# Altium PCB pcb_2Layer.PcbDoc
Units mm, origin at the board's own origin, x right, y up, seen from the top; angles counter-clockwise.
Board outline 100 x 50 mm, 2 copper layers (Top Layer, Bottom Layer), stack 1.576 mm thick; 50 components, 25 nets, 135 pads, 0 vias.
Unrouted connection lines stored in the file: 100.
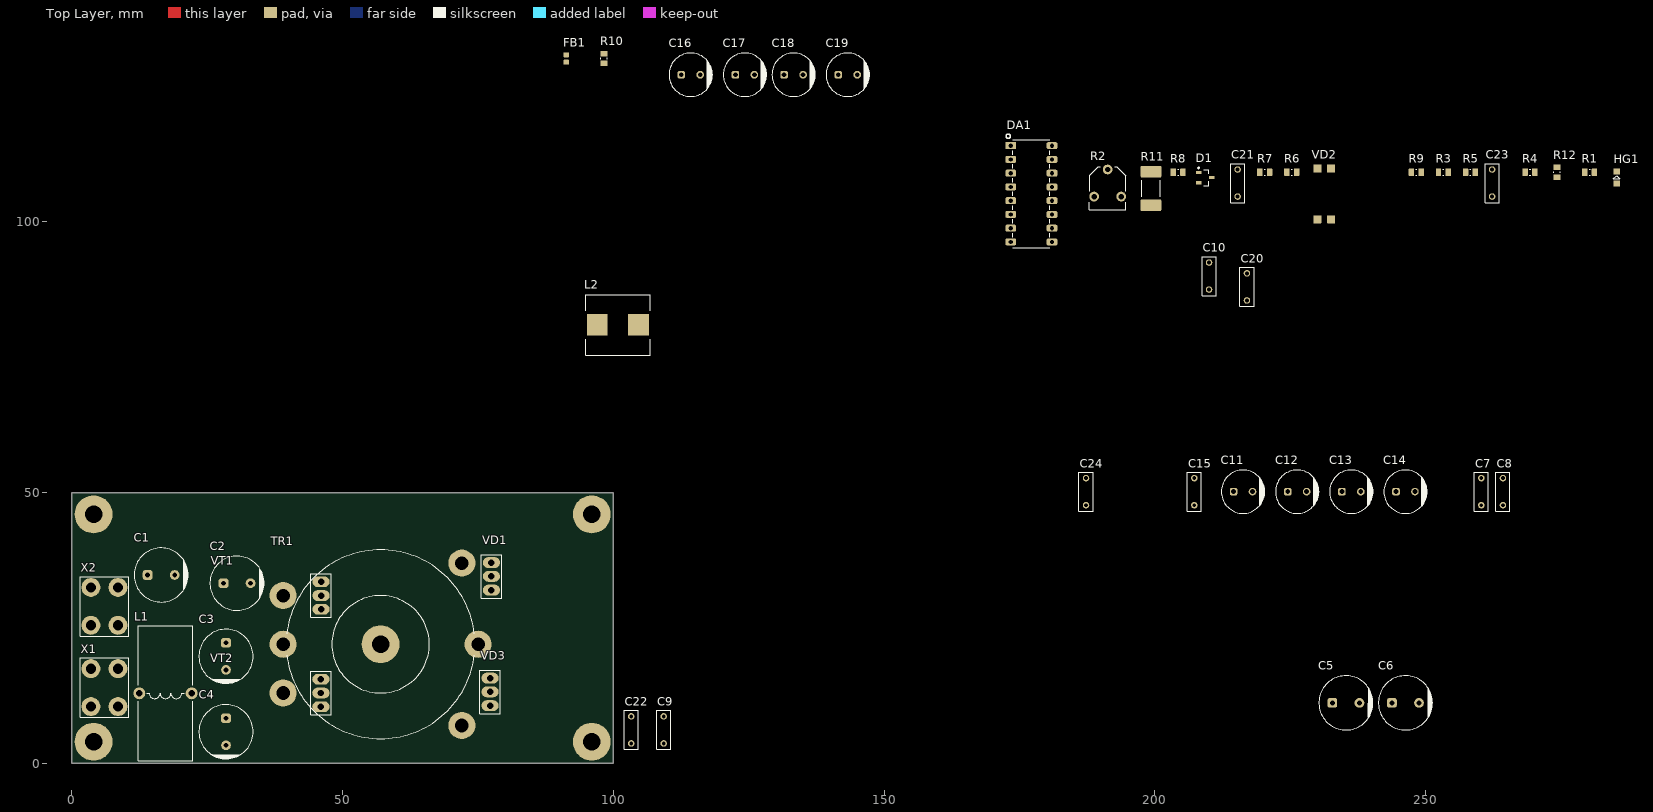
[diagram p0: Top Layer view]
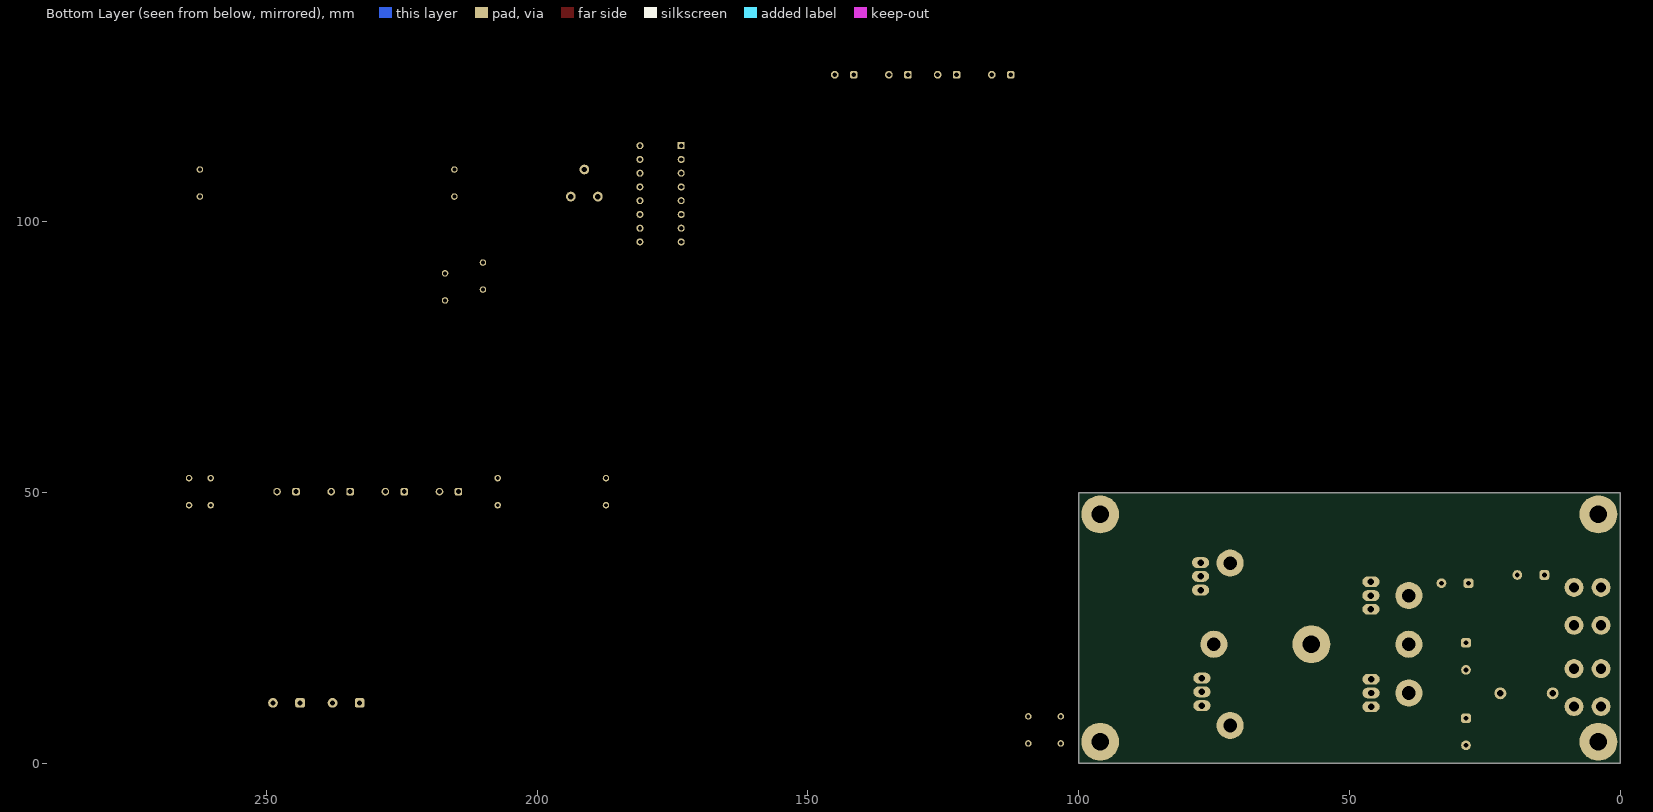
[diagram p1: Bottom Layer view, seen from below]

## Layer stack, top to bottom
Top Solder: solder mask 0.012, Solder Resist, Dk 3.5
Top Layer: signal copper 0.038
Dielectric 1: dielectric 1.5, FR-4, Dk 4.8
Bottom Layer: signal copper 0.038
Bottom Solder: solder mask 0.012, Solder Resist, Dk 3.5

## Board outline
0,0 100,0 100,50 0,50

## Design rules (kind name [scope] priority, off if disabled: settings)
BoardOutlineClearance [All] p1: gap=0.5 ignorepadtopadclearanceinfootprint=FALSE
Clearance MiddleVoltage [InNetClass('MiddleVoltage')] p1: gap=0.5 ignorepadtopadclearanceinfootprint=FALSE except(0: Arc-Hole Track-Hole SMDPad-Hole THPad-Hole Via-Hole Fill-Hole Poly-Hole Region-Hole Text-Hole; 0.2: Arc-Text Track-Text SMDPad-Text THPad-Text Via-Text Fill-Text Poly-Text Region-Text Text-Text)
Clearance HighVoltage [InNetClass('HighVoltage')] p2: gap=1 ignorepadtopadclearanceinfootprint=FALSE except(0: Arc-Hole Track-Hole SMDPad-Hole THPad-Hole Via-Hole Fill-Hole Poly-Hole Region-Hole Text-Hole; 0.2: Arc-Text Track-Text SMDPad-Text THPad-Text Via-Text Fill-Text Poly-Text Region-Text Text-Text)
Clearance Standart [All] p3: gap=0.2 ignorepadtopadclearanceinfootprint=FALSE except(0: Arc-Hole Track-Hole SMDPad-Hole THPad-Hole Via-Hole Fill-Hole Poly-Hole Region-Hole Text-Hole)
ComponentClearance [All] p1: gap=0.1 collisioncheckmode=3 verticalgap=0.1 showdistances=TRUE
Height [All] p1: minheight=0 maxheight=40 prefheight=12.7
HoleSize [All] p1: absolutevalues=TRUE maxlimit=12 minlimit=0.3 maxpercent=80.000 minpercent=20.000
HoleToHoleClearance [All] p1: gap=0.3 allowstackedmicrovias=TRUE
MinimumSolderMaskSliver [All] p1: minsoldermaskwidth=0.1
NetAntennae [All] p1: netantennaetolerance=2
PlaneClearance [All] p1: clearance=0.3
PlaneConnect PlaneConnectMiddleCurrent [InNetClass('MiddleCurrent')] p1: planeconnectstyle=Relief reliefexpansion=0.508 reliefentries=4 reliefconductorwidth=0.5 reliefairgap=0.3
PlaneConnect PlaneHighCurrent [InNetClass('HighCurrent')] p2: planeconnectstyle=Relief reliefexpansion=0.508 reliefentries=4 reliefconductorwidth=0.5 reliefairgap=0.35
PlaneConnect [All] p3: planeconnectstyle=Relief reliefexpansion=0.508 reliefentries=4 reliefconductorwidth=0.3 reliefairgap=0.3
PolygonConnect PolygonConnectMiddleCurrent [All vs InNetClass('MiddleCurrent')] p1: connectstyle=Relief reliefconductorwidth=0.4 reliefentries=4 polygonreliefangle="90 Angle" airgapwidth=0.3
PolygonConnect PolygonHighCurrent [InNetClass('HighCurrent')] p2: connectstyle=Relief reliefconductorwidth=0.5 reliefentries=4 polygonreliefangle="90 Angle" airgapwidth=0.3
PolygonConnect PolygonConnect_Keepout [(ObjectKind = 'Track') And (Layer = 'KeepOutLayer')] p3: connectstyle=Direct reliefconductorwidth=0.254 reliefentries=4 polygonreliefangle="90 Angle" airgapwidth=0.254
PolygonConnect PolygonConnect_Via [IsVia] p4: connectstyle=Direct reliefconductorwidth=0.254 reliefentries=4 polygonreliefangle="90 Angle" airgapwidth=0.254
PolygonConnect [All] p5: thpad.connectstyle=Relief thpad.reliefconductorwidth=0.3 thpad.reliefentries=4 thpad.polygonreliefangle="90 Angle" thpad.airgapwidth=0.25 smdpad.connectstyle=Relief smdpad.reliefconductorwidth=0.3 smdpad.reliefentries=4 smdpad.polygonreliefangle="90 Angle" smdpad.airgapwidth=0.25 via.connectstyle=Direct via.reliefconductorwidth=0.3 via.reliefentries=4 via.polygonreliefangle="90 Angle" via.airgapwidth=0.3
RoutingCorners [All] p1: cornerstyle=45-Degree minsetback=1 maxsetback=3
RoutingVias Power [InNetClass('Power')] p1: holewidth=0.8 width=1.5 viastyle="Through Hole" minholewidth=0.5 minwidth=1 maxholewidth=1.2 maxwidth=3
RoutingVias [All] p2: holewidth=0.4 width=0.8 viastyle="Through Hole" minholewidth=0.3 minwidth=0.6 maxholewidth=0.5 maxwidth=1
SilkToSilkClearance [All] p1: silktosilkclearance=0
SilkToSolderMaskClearance [IsPad] p1: minsilkscreentomaskgap=0.05 clearancetoexposedcopper=TRUE
SolderMaskExpansion SolderMaskExpansion_VIA [IsVia] p1: expansion=-3 istentingtop=TRUE useseparateexpansions=TRUE expansionbottom=-3 istentingbottom=TRUE
SolderMaskExpansion [All] p2: expansion=0.05 istentingtop=FALSE
SupplyNets "Schematic Supply Nets_7" [InNet('GND16')] p1: voltage=0.000
SupplyNets "Schematic Supply Nets_6" [InNet('+VBAT')] p2: voltage=0.000
SupplyNets "Schematic Supply Nets_5" [InNet('5VREF')] p3: voltage=0.000
SupplyNets "Schematic Supply Nets_4" [InNet('RSH')] p4: voltage=0.000
SupplyNets "Schematic Supply Nets_2" [InNet('GND')] p5: voltage=0.000
Width Width_ANT [InNetClass('Anthenna')] p1: maxlimit=1.641 minlimit=0.2 preferedwidth=1.641
Width WidthMiddleCurrent [InNetClass('MiddleCurrent')] p2: maxlimit=2 minlimit=0.35 preferedwidth=0.5
Width WidthHighCurrent [InNetClass('HighCurrent')] p3: maxlimit=5 minlimit=0.5 preferedwidth=1
Width [All] p4: maxlimit=0.5 minlimit=0.2 preferedwidth=0.25
19 further rules are at their usual default settings.

## Components (designator, comment, footprint, x,y, rotation, side; value= is the part's Value field where it differs from the comment)
C1 "1000uFx25V" CAP-AE-PTH-100D05x200H20 16.47,34.798 r0 top value=1000uF
C2 "1000uFx25V" CAP-AE-PTH-100D05x200H20 30.48,33.274 r0 top value=1000uF
C3 "1000uFx25V" CAP-AE-PTH-100D05x200H20 28.448,19.772 r270 top value=1000uF
C4 "1000uFx25V" CAP-AE-PTH-100D05x200H20 28.448,5.842 r270 top value=1000uF
C5 "1000uFx25V" CAP-AE-PTH-100D05x200H20 235.273,11.181 r0 top value=1000uF
C6 "1000uFx25V" CAP-AE-PTH-100D05x200H20 246.273,11.181 r0 top value=1000uF
C7 "Film capacitor, 100nF, 450VDC, ±10%, 10.9mOhm, 31.5x15 mm, -40...+105°C" "CAP: MKS2 (W=2.50MM)" 260.273,50.181 r90 top value=100nF
C8 "Film capacitor, 100nF, 450VDC, ±10%, 10.9mOhm, 31.5x15 mm, -40...+105°C" "CAP: MKS2 (W=2.50MM)" 264.273,50.181 r90 top value=100nF
C9 "Film capacitor, 10uF, 450VDC, ±10%, 10.9mOhm, 31.5x15 mm, -40...+105°C" "CAP: MKS2 (W=2.50MM)" 109.273,6.181 r90 top value=10uF
C10 "Film capacitor, 100nF, 450VDC, ±10%, 10.9mOhm, 31.5x15 mm, -40...+105°C" "CAP: MKS2 (W=2.50MM)" 210,90 r90 top value=100nF
C11 "470uFx25V" CAP-AE-PTH-80D05x130H15 216.273,50.181 r0 top value=470uF
C12 "470uFx25V" CAP-AE-PTH-80D05x130H15 226.273,50.181 r0 top value=470uF
C13 "470uFx25V" CAP-AE-PTH-80D05x130H15 236.273,50.181 r0 top value=470uF
C14 "470uFx25V" CAP-AE-PTH-80D05x130H15 246.273,50.181 r0 top value=470uF
C15 "Film capacitor, 100nF, 450VDC, ±10%, 10.9mOhm, 31.5x15 mm, -40...+105°C" "CAP: MKS2 (W=2.50MM)" 207.273,50.181 r90 top value=100nF
C16 "470uFx25V" CAP-AE-PTH-80D05x130H15 114.273,127.181 r0 top value=470uF
C17 "470uFx25V" CAP-AE-PTH-80D05x130H15 124.273,127.181 r0 top value=470uF
C18 "470uFx25V" CAP-AE-PTH-80D05x130H15 133.273,127.181 r0 top value=470uF
C19 "470uFx25V" CAP-AE-PTH-80D05x130H15 143.273,127.181 r0 top value=470uF
C20 "Film capacitor, 100nF, 450VDC, ±10%, 10.9mOhm, 31.5x15 mm, -40...+105°C" "CAP: MKS2 (W=2.50MM)" 217,88 r90 top value=100nF
C21 "Film capacitor, 100nF, 450VDC, ±10%, 10.9mOhm, 31.5x15 mm, -40...+105°C" "CAP: MKS2 (W=2.50MM)" 215.273,107.181 r90 top value=100nF
C22 "Film capacitor, 1n, 450VDC, ±10%, 10.9mOhm, 31.5x15 mm, -40...+105°C" "CAP: MKS2 (W=2.50MM)" 103.273,6.181 r90 top value=1n
C23 "Film capacitor, 1n, 450VDC, ±10%, 10.9mOhm, 31.5x15 mm, -40...+105°C" "CAP: MKS2 (W=2.50MM)" 262.273,107.181 r90 top value=1n
C24 "Film capacitor, 100nF, 450VDC, ±10%, 10.9mOhm, 31.5x15 mm, -40...+105°C" "CAP: MKS2 (W=2.50MM)" 187.273,50.181 r90 top value=100nF
D1 "TL431ACDBZR" SOT-23_MED 209.273,108.181 r0 top
DA1 "UC3525" DIP16 173.38,114.08 r0 top
FB1 "BLM18KG331SH1D" BLM18-Series_H80T15 91.273,130.181 r90 top value="330 Ohms @ 100MHz"
HG1 "LTST-C171GKT" LTST-C171GKT 285.273,108.181 r90 top
L1 "Fixed inductor, 10μH, ±20%, R22.9/14/7.62, Kool Mu, µ=125, 90 нГн/витков2" "IND: R22.9/14/7.62 (H)" 17.272,12.954 r180 top value=10μH
L2 "2.4uH" 744325240 100.82,81 r180 top
R1 "22" R_ANY_CHIP_0805_MED 280.273,109.181 r0 top
R2 "20k" 3306F-1-xxx 191.273,107.181 r0 top
R3 "22" R_ANY_CHIP_0805_MED 253.273,109.181 r0 top
R4 "120" R_ANY_CHIP_0805_MED 269.273,109.181 r0 top
R5 "1k" R_ANY_CHIP_0805_MED 258.273,109.181 r0 top
R6 "1k" R_ANY_CHIP_0805_MED 225.273,109.181 r0 top
R7 "22" R_ANY_CHIP_0805_MED 220.273,109.181 r0 top value=10k
R8 "2k7" R_ANY_CHIP_0805_MED 204.273,109.181 r0 top
R9 "1k" R_ANY_CHIP_0805_MED 248.273,109.181 r0 top
R10 "1k" R_ANY_CHIP_0805_MED 98.273,130.181 r90 top
R11 "40mOhm" HoLLR2512-Series 199.273,106.181 r90 top value=0.04
R12 "15k" R_ANY_CHIP_0805_MED 274.273,109.181 r90 top
TR1 "TR" "TR: R32.8/20.1/10.7 (L) - MidPoint - 2" 57,22 r0 top
VD1 "DIODE SCHOTTKY" TO220(H) 77.47,34.544 r270 top
VD2 "LTV-817S-TA1" LTV-817S-TA1_REC 231.273,105.181 r0 top
VD3 "DIODE SCHOTTKY" TO220(H) 77.216,13.208 r270 top
VT1 "AOD403" TO220(H) 46,31 r90 top
VT2 "AOD403" TO220(H) 45.974,13 r90 top
X1 "Power connector, *, *" "CON: 8191" 6,14 r0 top
X2 "Power connector, *, *" "CON: 8191" 6,29 r0 top

## Footprints (in the part's own frame and the unit in brackets; to place one, negate y for a bottom-side part, rotate by r counter-clockwise, add the part's x,y. Pads: shape width x height; smd on the part's side, far side on the other; paste and mask are expansions set on the pad)
3306F-1-xxx [mm] "Trimmer Potentiometer"
  round 1.8 hole 1 mask+0.05: 1(-2.5,-2.5) 2(0,2.5) 3(2.5,-2.5)
  silkscreen extent -3.36,-4.95 3.35,3, body extent -3.4,-5.05 3.41,3.07, height 8.34
744325240 [mm]
  rrect5% 3.85x4 smd: 1(-3.82,0) 2(3.82,0)
  silkscreen extent -5.98,-5.53 5.98,5.59, body extent -5.82,-5.35 5.82,5.35, height 5
BLM18-Series_H80T15 [mm] "Chip Inductor, 2-Leads, Body 1,60x0,80mm, IPC Medium Density"
  rrect15% 0.87x0.98 smd mask+0.05: 1(-0.665,0) 2(0.665,0)
  body extent -0.87,-0.47 0.88,0.48, height 0.95
CAP-AE-PTH-80D05x130H15 [mm] "PTH Aluminium Electrolytic Capacitor, Diameter 8mm, Height 13mm"
  rrect50% 1.4x1.4 hole 0.9: 1(-1.75,0)
  round 1.4 hole 0.9: 2(1.75,0)
  silkscreen extent -4,-4 4.03,4, body extent -4.25,-4.25 4.25,4.25, height 14.5
CAP-AE-PTH-100D05x200H20 [mm] "PTH Aluminium Electrolytic Capacitor, Diameter 10mm, Height 20mm"
  rrect50% 1.8x1.8 hole 0.9: 1(-2.5,0)
  round 1.8 hole 0.9: 2(2.5,0)
  silkscreen extent -5,-5 5,5, body extent -5.25,-5.25 5.25,5.25, height 22
"CAP: MKS2 (W=2.50MM)" [mm]
  round 1.2 hole 0.7: 1(-2.5,0) 2(2.5,0)
  silkscreen extent -3.6,-1.3 3.6,1.3, body extent -3.6,-1.25 3.6,1.25, height 6.5
"CON: 8191" [mm]
  round 3.5 hole 1.9: 1(-2.5,-3.5) 1(-2.5,3.5) 1(2.5,-3.5) 1(2.5,3.5)
  silkscreen extent -4.5,-5.5 4.5,5.5, body extent -4,-4 4,4, height 7.05
DIP16 [mm]
  rect 2x1.295 / inner round 1.524 / far side rect 1.295x1.295 hole 0.787 paste-2539.97 mask+0: 1(0,0)
  rrect50% 2x1.295 / inner round 1.524 / far side round 1.295 hole 0.8 paste-2539.97 mask+0: 2(0,-2.54) 3(0,-5.08) 4(0,-7.62) 5(0,-10.16) 6(0,-12.7) 7(0,-15.24) 8(0,-17.78) 9(7.62,-17.78) 10(7.62,-15.24) 11(7.62,-12.7) 12(7.62,-10.16) 13(7.62,-7.62) 14(7.62,-5.08) 15(7.62,-2.54) 16(7.62,0)
  silkscreen extent -0.88,-18.86 7.24,2.15, body extent -0.13,-18.73 8,0.95, height 5.21
HoLLR2512-Series [mm]
  rrect15% 2.1x3.8 smd mask+0.05: 1(-3.1,0) 2(3.1,0)
  silkscreen extent -1.5,-1.7 1.5,1.7, body extent -3.3,-1.71 3.3,1.72, height 0.89
"IND: R22.9/14/7.62 (H)" [mm]
  round 2.2 hole 1.2: 1(-4.83,0.015) 2(4.83,0.015)
  silkscreen extent -5,-12.5 5,12.5, body extent -4.83,-12.47 4.83,12.47, height 24.77
LTST-C171GKT [mm]
  rrect15% 1.1x1.25 smd mask+0.05: AN(-1.1,0) CA(1.1,0)
  silkscreen extent -0.25,-0.6 0.35,0.6, body extent -1.05,-0.67 1.05,0.68, height 0.9
LTV-817S-TA1_REC [mm] "SMD Optocoupler 5kV"
  rrect15% 1.5x1.5 smd: 1(-1.27,-4.7) 2(1.27,-4.7) 3(1.27,4.7) 4(-1.27,4.7)
  body extent -2.31,-5.09 2.29,5.07, height 3.76
R_ANY_CHIP_0805_MED [mm] "Chip Resistor, 2-Leads, Body 2,00x1,25mm, IPC Medium Density"
  rrect15% 1x1.35 smd: 1(-0.9,0) 2(0.9,0)
  silkscreen extent -0.1,-0.58 0.1,0.58, body extent -1,-0.67 1,0.68, height 0.6
SOT-23_MED [mm] "SOT23, 3-Leads, Body 2,92x2,37mm, Pitch 0,95mm, IPC Medium Density"
  rrect15% 1x0.6 smd: 1(-1.2,0.95) 2(-1.2,-0.95) 3(1.2,0)
  silkscreen extent -1.32,-1.5 0.7,1.92, body extent -1.32,-1.52 1.32,1.52, height 1.12
TO220(H) [mm]
  oval 2x3.2 hole 1.2: 1(-2.54,0) 2(0,0) 3(2.54,0)
  silkscreen extent -4,-1.9 4,1.9, body extent -4.95,-0.37 4.95,20.67, height 2.76
"TR: R32.8/20.1/10.7 (L) - MidPoint - 2" [mm]
  round 5 hole 2.5: 1(-18,9) 2(-18,-9) 3(-18,0) 4(15,15) 5(15,-15) 6(18,0)
  round 7 hole 3.2: ""(0,0)
  silkscreen extent -17.31,-17.43 17.31,17.43, body extent -17.43,-17.4 17.43,17.4, height 12.84

## Part data
C1 C2 C3 C4 C5 C6: library part ESH108M025AH4AA, "1000uF 25V ±20% Aluminum Electrolytic Capacitors Radial, 2000 Hrs @ 105°C, 740mA Ripple Current", Dielectric Type=NONE, Manufacturer=Kemet, Package=D10x20mm, Supplier Part Number 1=80-ESH108M025AH4AA, Temperature Range="-40°C ~ 105°C", Tolerance=±20%, Voltage=25V, Ajax_1C_PN=NONE, Ajax_1С_Status="RND Only", Component Status=Released, Component Type=PTH, ComponentLink1Description=Datasheet, ComponentLink1URL=https://eu.mouser.com/datasheet/2/212/KEM_A4005_ESH-1101279.pdf, Part Number=ESH108M025AH4AA, Part Type=Aluminum, Price=NONE, Replacement=NONE, Standard Lead Time="30 Weeks", Supplier 1=Mouser
C7 C8 C9 C10 C15 C20 C21 C22 C23 C24: library part Film, Manufacturer=Epcos, Package="31.5x15 mm", PartNumber=B32774D4106K000, Temperature=-40...+105°C, Tolerance=±10%, TypeCapacitor="Film capacitor", Voltage=450VDC, HelpURL=https://www.digikey.com/products/en/capacitors/film-capacitors/62?k=&pkeyword=&sv=0&pv2097=1958&sf=0&FV=fffc01ef%2C1f140000%2Cffe0003e%2Cffec6366&quantity=1&ColumnSort=1000011&page=1&stock=1&pageSize=25, Impedance=10.9mOhm
  C7 C8 C10 C15 C20 C21 C24: ValueManufacturerPartNumber="Film capacitor, 100nF, 450VDC, ±10%, 10.9mOhm, 31.5x15 mm, -40...+105°C"
  C9: ValueManufacturerPartNumber="Film capacitor, 10uF, 450VDC, ±10%, 10.9mOhm, 31.5x15 mm, -40...+105°C"
  C22 C23: ValueManufacturerPartNumber="Film capacitor, 1n, 450VDC, ±10%, 10.9mOhm, 31.5x15 mm, -40...+105°C"
C11 C12 C13 C14 C16 C17 C18 C19: library part KS-025V471MF130, "470uF 25V ±20% D8x13mm Conductive Polymer Aluminum Solid Capacitor, 2000 Hrs @ 105°C, 4100mA Ripple Current", Dielectric Type=NONE, Manufacturer=Koshin, Package=D8x13mm, Temperature Range="-55°C ~ 105°C", Tolerance=±20%, Voltage=25V, Ajax_1C_ID=45913, Ajax_1C_PN="470uF 25V 20% Low ESR 8x13mm (KS-025V471MF130 - Koshin) Aluminium Capacitors", Ajax_1С_Status="Mass Production", Component Status=Released, Component Type=PTH, ComponentLink1Description=Datasheet, ComponentLink1URL=\\altiumdb.ajax.local\files\Datasheet\Capacitor\KS-Series.pdf, GUID_1C=2652f362-010b-11ed-a361-005056994834, Part Number=KS-025V471MF130, Part Type=Aluminum, Price=0.07, Replacement=NONE
D1: "Adjustable Precision Shunt Regulator, Accuracy 1%,  SOT-23-3", Manufacturer="Texas Instruments", Package=SOT-23, Supplier Part Number 1=296-17328-1-ND, Temperature Range="0°C ~ 70°C", Ajax_1C_ID=6287, Ajax_1C_PN="TL431ACDBZR (SOT-23)", Ajax_1С_Status="Mass Production", Component Status=Released, Component Type=SMD, ComponentLink1Description=Datasheet, ComponentLink1URL=https://www.ti.com/lit/ds/symlink/tl431.pdf, GUID_1C=b426e85d-df70-11e4-9f89-a45d36c4a9e5, Part Number=TL431ACDBZR, Part Type="Voltage Reference", Price=0.046, Replacement=NONE, Standard Lead Time="8 Weeks", Supplier 1=Digi-Key
DA1: "Buck, Push-Pull Regulator Positive Output Step-Down, Step-Up/Step-Down DC-DC Controller IC 16-DIP/16-SOIC", Manufacturer=Texas, Package=DIP16, Part Number=UC3825, Supplier Part Number 1=1727-6049-2-ND, Temperature Range="-40°C ~ 125°C", Component Status=Released, Component Type=SMD, ComponentLink1Description=Datasheet, ComponentLink1URL=https://assets.nexperia.com/documents/data-sheet/74HC_HCT4051.pdf, GUID_1C=956a5446-e932-11eb-ab74-0050569f2651, Part Type="IC REG CTRLR BCK/PUSH-PULL", Price=0.11383574, Replacement=NONE, Standard Lead Time="8 Weeks", Supplier 1=Digi-Key
FB1: "330 Ohms @ 100 MHz Power Line Ferrite Bead 0603, 1.7A 80mOhm", Current=1.7A, Manufacturer="Murata Electronics", Package=0603, Saturation Current=NONE, Supplier Part Number 1=490-13257-2-ND, Temperature Range="-55°C ~ 125°C", Tolerance=±25%, Ajax_1C_ID=31487, Ajax_1C_PN="330R 1.7A BLM18KG331SH1D 0603 Murata Ferrite Bead", Ajax_1С_Status="RND Only", Component Status=Released, Component Type=SMD, ComponentLink1Description=Datasheet, ComponentLink1URL=https://www.murata.com/en-us/products/productdata/8796737273886/QNFA9101.pdf, GUID_1C=8fa34a67-d98f-11eb-ab74-0050569f2651, Part Number=BLM18KG331SH1D, Part Type="Ferrite Bead", Price=0.0072, Replacement=NONE, Standard Lead Time="15 Weeks", Supplier 1=Digi-Key
HG1: "Low Power LED, Green 565nm, Clear, SMD 0805, Vf 2.1V - 2.6V, 5 ~ 12mcd @ 20 mA, 130°", Color=Green, Manufacturer="Lite-On Optoelectronics", Package=0805, Supplier Part Number 1=160-1423-2-ND, Temperature Range="-55°C ~ 85°C", Ajax_1C_ID=30364, Ajax_1C_PN="LTST-C171GKT Green SMD LED 0805 12mcd 20mA 130deg RoHS", Ajax_1С_Status="RND Only", Component Status=Released, Component Type=SMD, ComponentLink1Description=Datasheet, ComponentLink1URL=https://media.digikey.com/pdf/Data%20Sheets/Lite-On%20PDFs/LTST-C171GKT.pdf, GUID_1C=df39881f-c399-11eb-ab74-0050569f2651, Part Number=LTST-C171GKT, Part Type="LED / 0805", Price=0.06, Replacement=NONE, Supplier 1=Digi-Key, Wavelength=565nm
L1: library part Inductor_R22.9/14/7.62, Manufacturer=Magnetics, Package=R22.9/14/7.62, PartNumber=0077310A7, Tolerance=±20%, TypeInductor="Fixed inductor", ValueManufacturerPartNumber="Fixed inductor, 10μH, ±20%, R22.9/14/7.62, Kool Mu, µ=125, 90 нГн/витков2", AL="90 нГн/витков2", HelpURL=http://ferrite.ru/warehouse/r-22-9147-62-77310-a7.html, MaterialPermeability=µ=125, TypeMatiriel="Kool Mu"
L2: library part 744325240, "2.4uH Shielded Wirewound Inductor 14A 4.75mOhm Max, 10.5x10.2mm, Height 5mm Max", Current=14A, Manufacturer="Wurth Elektronik", Package=10.5x10.2x5mm, Saturation Current=17A, Supplier Part Number 1=732-1168-2-ND, Temperature Range="-40°C ~ 150°C", Tolerance=±20%, Ajax_1C_ID=66330, Ajax_1C_PN="2.4uH 14A 20% 744325240 Wurth SMD Inductor", Ajax_1С_Status="RND Only", Component Status=Released, Component Type=SMD, ComponentLink1Description=Datasheet, ComponentLink1URL=https://eu.mouser.com/datasheet/2/445/744325240-3093497.pdf, GUID_1C=708811f9-d448-11ed-a36c-005056994834, Part Number=744325240, Part Type="Power / Iron Powder Core", Price=4.27, Replacement=NONE, Standard Lead Time="26 Weeks", Supplier 1=Digi-Key
R1 R3 R4 R5 R6 R7 R8 R9 R10 R12: library part RC0805JR-0722RL, "22 Ohms ±5%, 1/8W 0805 Thick Film Resistor", Manufacturer=Yageo, Package=0805, Power Rating=0.125W, Temperature Range="-55°C ~ 155°C", Temperature Stability=±100ppm/°C, Tolerance=±5%, Voltage=150V, Ajax_1C_ID=8822, Ajax_1C_PN="22R 5% 0805 Resistors SMD RoHS", Ajax_1С_Status="Mass Production", Component Status=Released, Component Type=SMD, ComponentLink1Description=Datasheet, ComponentLink1URL=https://eu.mouser.com/datasheet/2/447/PYu_RC_Group_51_RoHS_L_10-1664068.pdf, GUID_1C=3ba40fec-5951-11e6-81ec-d8cb8a9acc66, Part Number=RC0805JR-0722RL, Part Type="Thick Film", Price=0.0011, Replacement=NONE
R2: library part 3306F-1-203, "20 kOhms ±25%, 0.2W, PTH Trimmer Potentiometer, Cermet, Turn Top Adjustment", Manufacturer=Bourns, Package=8.1x6.8mm, Power Rating=0.2W, Temperature Range="-25°C ~ 100°C", Temperature Stability=±250ppm/°C, Tolerance=±25%, Ajax_1C_PN=NONE, Ajax_1С_Status="RND Only", Component Status="On Review", Component Type=PTH, ComponentLink1Description=Datasheet, ComponentLink1URL=https://www.bourns.com/docs/Product-Datasheets/3306.pdf, Part Number=3306F-1-203, Part Type="Trimming Potentiometer", Price=NONE, Replacement=NONE, Supplier 1=Digi-Key, Supplier Part Number 1=3306F-1-203
R11: library part HoLLR2512-2W-40mR-1%, "40mOhm ±1%, 2W Surface Mount 77.5A ±50ppm 2512 Encapsulated Metal Alloy Current Sense Resistors", Manufacturer=Milliohm, Package=2512, Power Rating=2W, Supplier Part Number 1=C2994633, Temperature Range="-55°C ~ 170°C", Temperature Stability=±50ppm/°C, Tolerance=±1%, Voltage=NONE, Ajax_1C_PN=NONE, Ajax_1С_Status="RND Only", Component Status=Released, Component Type=SMD, ComponentLink1Description=Datasheet, ComponentLink1URL=https://datasheet.lcsc.com/lcsc/2204121445_Milliohm-HoLLR2512-2W-40mR-1-_C2994633.pdf, Part Number=HoLLR2512-2W-40mR-1%, Part Type="Metal Alloy", Price=NONE, Replacement=NONE, Supplier 1=LCSC
TR1: library part "Toroidal Transformator Midpoint_1", Manufacturer=Handmade, Part Number=RLB0914-3R3ML-ND, Saturation Current=11.3A, Tolerance=±20%, ComponentLink1Description=Datasheet, ComponentLink1URL=https://www.vishay.com/docs/34193/ihlp-4040dz-01.pdf
VD1 VD3: "Diode Schottky Array 1 Pair Common Cathode, 120V 20A, TO-220", Current=20A, Manufacturer=STMicroelectronics, Package=TO-220AB, Part Number=STPS20SM120ST, Supplier Part Number 1=497-15563-5-ND, Temperature Range="-65°C ~ 150°C", Voltage=120V, Component Status=Released, Component Type=PTH, ComponentLink1Description=Datasheet, ComponentLink1URL=https://www.st.com/resource/en/datasheet/stps20sm120s.pdf, Marking=STPS20SM120, Part Type=Schottky, Price=NONE, Replacement=NONE, Standard Lead Time="11 Weeks", Supplier 1=Digi-Key, Vf="0.75V @ 10A"
VD2: "1-Channel Photocoupler, 5kV, SSOP-4", Color=NONE, Manufacturer="Lite-On Optoelectronics", Package=SSOP-4, Supplier Part Number 1=160-1893-2-ND, Temperature Range="-55°C ~ 110°C", Ajax_1C_ID=12260, Ajax_1C_PN="LTV-817S-TA1 оптопара", Ajax_1С_Status="Mass Production", Component Status=Released, Component Type=SMD, ComponentLink1Description=Datasheet, ComponentLink1URL=https://optoelectronics.liteon.com/upload/download/DS-70-96-0016/LTV-8X7%20series%20201610%20.pdf, GUID_1C=36a51d61-3103-11e8-822a-14dda9d2d04d, Part Number=LTV-817S-TA1, Part Type=Optocoupler, Price=0.053, Replacement=LTV-816S-TA1, Supplier 1=Digi-Key, Wavelength=NONE
VT1 VT2: library part N-CH_MOSFET, "P-MOSFET; полевой; -30В; -55А; 45Вт; TO252", Package=D-PAK, Component Type=SMD, ComponentLink1Description=Datasheet, ComponentLink1URL=https://www.tme.eu/Document/dd9e9fcbccf7c5b1f5f9da06cbc5bf44/AOD403-DTE.pdf, ComponentLink2Description=imrad, ComponentLink2URL=https://imrad.com.ua/ua/aod403-7?srsltid=AfmBOoqbv76D2b_UWMskTCTCmXEIhcjdT6a5VOgt9k0M-VKdEIqWTw9d, Id=-55А, Part Number=AOD403, Part Type=P-Channel, RDS=8mR, Vds=-30V
X1 X2: library part Connector_single_power, TypeConnector="Power connector", ValueManufacturerPartNumber="Power connector, *, *"
  X1: CommentText=+
  X2: CommentText=-

## Free pads (board coordinates)
  round 7 hole 3.2: 1(4,4) 1(4,46) 1(96,4) 1(96,46)

## Nets (pads, with @x,y where several pads share a name; then routed paths per layer and width w, separated by ;. In a path a pad name is that pad's centre, name@x,y a point inside that pad or via, vN(x,y) a via of type N, cw(c..) or ccw(c..) an arc to the next point about the centre after c; other vN are vias at no path point)
5VREF: C24.1 DA1.1 FB1.2 R9.2
+VBAT: C1.1 C2.1 C3.1 C4.1 C5.1 C6.1 C7.1 C8.1 C9.1 C10.1 C11.1 C12.1 C13.1 C14.1 C16.1 C17.1 C18.1 C19.1 C20.1 DA1.13 DA1.15 L1.1 L2.2 R5.2 R7.2 R10.2 TR1.3
COMP: DA1.9 R9.1 VD2.4
G1: R1.2 VT1.1
G2: R3.2 VT2.1
GND: C1.2 C2.2 C3.2 C4.2 C5.2 C6.2 C7.2 C9.2 C10.2 C22.1 C23.2 C24.2 DA1.2 DA1.12 R2.1 R11.2 R12.1 VD2.3 X2.1
GND16: C11.2 C12.2 C13.2 C14.2 C15.1 C16.2 C17.2 C18.2 C19.2 C20.2 D1.3 HG1.CA R8.1 TR1.6
NetC21_1: C21.1 D1.1 R6.1 VD2.2
NetC21_2: C21.2 D1.2 R7.1 R8.2
NetC23_1: C23.1 DA1.5 R4.2
NetDA1_6: DA1.6 R12.2
NetDA1_7: DA1.7 R4.1
NetDA1_11: DA1.11 R1.1
NetDA1_14: DA1.14 R3.1
NetDA1_16: DA1.16 FB1.1
NetHG1_AN: HG1.AN R10.1
NetL1_2: L1.2 X1.1
NetL2_1: L2.1 VD1.2 VD3.2
NetR5_1: R5.1 R6.2 VD2.1
NetTR1_1: TR1.1 VT1.2
NetTR1_2: TR1.2 VT2.2
NetTR1_4: TR1.4 VD1.1 VD1.3
NetTR1_5: TR1.5 VD3.1 VD3.3
RSH: C22.2 R2.3 R11.1 VT1.3 VT2.3
SHDN: DA1.10 R2.2
pads on no net: C8.2 C15.2 DA1.3 DA1.4 DA1.8 TR1.

## Silkscreen, mask and mechanical layers (free items; w line width, h text height)
Board:
  the board outline again, w0.254
Title:
  lines w0.1: 198.8,199.4 266.75,199.4
  lines w0.127: -44.879,10.002 -39.799,10.002 ; -44.879,80.487 -39.799,80.487 ; -44.879,150.972 -39.799,150.972 ; 4.397,-60.483 4.397,-55.403 ; 4.397,216.377 4.397,221.457 ; 53.546,-60.483 53.546,-55.403 ; 53.546,216.377 53.546,221.457 ; 102.695,-60.483 102.695,-55.403 ; 102.695,216.377 102.695,221.457 ; 151.971,-60.483 151.971,-55.403 ; 151.971,216.377 151.971,221.457 ; 194.725,-55.375 194.725,-25.375 343.725,-25.375 ; 194.725,-50.375 343.725,-50.375 ; 194.725,-45.375 343.725,-45.375 ; 194.725,-35.375 343.725,-35.375 ; 201.12,-60.483 201.12,-55.403 ; 201.12,216.377 201.12,221.457 ; 209.725,-45.375 209.725,-35.375 ; 250.269,-60.483 250.269,-55.403 ; 250.269,216.377 250.269,221.457 ; 279.725,-55.375 279.725,-45.375 ; 299.545,-60.483 299.545,-55.403 ; 299.545,216.377 299.545,221.457 ; 328.725,-45.375 328.725,-35.375 ; 343.741,10.002 348.821,10.002 ; 343.741,80.487 348.821,80.487 ; 343.741,150.972 348.821,150.972 ; -44.879,-60.483 348.821,-60.483 348.821,221.457 -44.879,221.457 -44.879,-60.483 ; -39.799,-55.403 343.741,-55.403 343.741,216.377 -39.799,216.377 -39.799,-55.403
  text "1" at -20.842,218.028 h1.78
  text "2" at 28.197,218.028 h1.78
  text "3" at 77.456,218.028 h1.78
  text "4" at 126.749,218.028 h1.78
  text "5" at 176.025,218.028 h1.78
  text "6" at 225.047,218.028 h1.78
  text "7" at 274.577,218.028 h1.78
  text "8" at 323.599,218.028 h1.78
  text "NOTES: UNLESS OTHERWISE SPECIFIED." at 200.2,200.45 h2.5
  text "1. MATERIAL:BASE MATERIAL LAMINATED EPOXY GLASS (ANY COLOR)" at 200.35,194.4 h2.5
  text "GRADE NEMA FR-4. ALL SIDES 1 OZ COPPER PER MIL-P-13949." at 206.95,189.9 h2.5
  text "AND IS UL APPROVED MFR SOURCE WITH 1.6 mm +-10 PERCENT" at 206.95,186.2 h2.5
  text "A" at -42.974,184.043 h1.78
  text "A" at 345.646,184.043 h1.78
  text "2. SOLDER PLATE PER QQ-S-571." at 200.35,181.9 h2.5
  text "3. SILKSCREEN IS ABSENT." at 200.35,177.9 h2.5
  text "4. DIMENSIONS IN MILLIMETERS, (...) - FOR REFERENCE," at 200.3,173 h2.5
  text "TOLERANCE ARE: +-0.15; HOLES: +- 0.05." at 207.45,168.95 h2.5
  text "5. LIQUID PHOTO IMAGABLE SOLDERMASK ENTHRONE DSR3241" at 200.35,164.9 h2.5
  text "OR ALTERNATIVE." at 207.45,160.95 h2.5
  text "6.  FOR REF ONLY: THIS BOARD HAS SMD ON BOTH SIDES." at 200.35,156.9 h2.5
  text "7.  THE FINISH OF THE BOARD IS HASL." at 200.2,150.5 h2.5
  text "8. PCB stackup:" at 200.2,144.8 h2.5
  text "B" at -42.974,113.431 h1.78
  text "B" at 345.646,113.431 h1.78
  text "C" at -42.974,42.819 h1.78
  text "C" at 345.646,42.819 h1.78
  text "D" at -42.974,-27.285 h1.78
  text "D" at 345.646,-27.285 h1.78
  text "TITLE:" at 195.7,-27.8 h1.2
  text "SIZE:" at 195.7,-37.55 h1.2
  text "DWG NO:" at 210.7,-37.55 h1.2
  text "REV:" at 330.2,-37.55 h1.2
  text ".Project_Version" at 335.4,-38.7 h2.5
  text "A3" at 201.7,-42.3 h2.5
  text "DATE:" at 195.7,-47.55 h1.2
  text "PCB DESIGNER:" at 281.2,-47.55 h1.2
  text ".PRINT_DATE" at 209.2,-48.8 h2.5
  text "FILE NAME:" at 195.7,-52.55 h1.2
  text "SHEET:" at 280.95,-52.55 h1.2
  text ".PCB_FILE_NAME_NO_PATH" at 209.2,-53.8 h2.5
  text "1 OF 1" at 298.95,-54.05 h2.5
  text "1" at -20.842,-58.832 h1.78
  text "2" at 28.197,-58.832 h1.78
  text "3" at 77.456,-58.832 h1.78
  text "4" at 126.749,-58.832 h1.78
  text "5" at 176.025,-58.832 h1.78
  text "6" at 225.047,-58.832 h1.78
  text "7" at 274.577,-58.832 h1.78
  text "8" at 323.599,-58.832 h1.78

## Dimensions
0,50 to 0,0 on Dimensions
0,50 to 100,50 on Dimensions

## Text inside footprints (layer, text, board x,y; h text height)
C1: Top Assembly "+" at 13.67,32.898 h0.9
C2: Top Assembly "+" at 27.68,31.374 h0.9
C3: Top Assembly "+" at 26.548,22.572 h0.9 r270
C4: Top Assembly "+" at 26.548,8.642 h0.9 r270
C5: Top Assembly "+" at 232.473,9.281 h0.9
C6: Top Assembly "+" at 243.473,9.281 h0.9
C11: Top Assembly "+" at 214.123,51.381 h0.9
C12: Top Assembly "+" at 224.123,51.381 h0.9
C13: Top Assembly "+" at 234.123,51.381 h0.9
C14: Top Assembly "+" at 244.123,51.381 h0.9
C16: Top Assembly "+" at 112.123,128.381 h0.9
C17: Top Assembly "+" at 122.123,128.381 h0.9
C18: Top Assembly "+" at 131.123,128.381 h0.9
C19: Top Assembly "+" at 141.123,128.381 h0.9
HG1: Top Assembly "2" at 285.398,107.281 h0.3 r90; Top Assembly "1" at 285.398,108.931 h0.3 r90